# EAGLE board Sen_2222 (EAGLE 6.0)

Size 63.48 x 50.47 mm. Coordinates in mm from the lower left corner, seen from the top.
Outline: 0,0 63.48,0 63.48,50.47 0,50.47 0,0
Copper layers (1*16): Top 0.035mm / dielectric 1.5mm / Bottom 0.035mm
Design rules: minimum track width 10mil, minimum drill 24mil, track to track 8mil, track to pad 8mil, pad to pad 8mil, via to via 8mil, smd to smd 8mil, copper to edge 40mil, drill to drill 8mil, minimum pad ring 10mil, minimum via ring 8mil, stop-mask expansion 4mil, vias tented up to drill 0mil, thermal gap 10mil
tRestrict: area 49.5,25.4 to 54.6,27.9; area 53.7,3.8 to 55,5.1; area 47,3.8 to 48.3,5.1; area 36.8,26.7 to 41.9,31.8; area 57.1,1.3 to 62.2,6.3; area 57.1,26.7 to 62.2,31.8; area 36.8,44.5 to 41.9,49.5
bRestrict: area 49.5,25.4 to 54.6,27.9; area 47,3.8 to 48.3,5.1; area 53.7,3.8 to 55,5.1; area 36.8,26.7 to 41.9,31.8; area 57.1,1.3 to 62.2,6.3; area 57.1,26.7 to 62.2,31.8; area 36.8,44.5 to 41.9,49.5

## Footprints (pad centres in the part's own frame; a part is rotated, then mirrored left to right if it is on the bottom)
0402-CAP = smd 0.7 x 0.9: 1 -0.65,0; 2 0.65,0
EIA3216 = smd 1.4 x 1.6: A 1.4,0; C -1.4,0
A1353HEX = drill 0.813 long: 1 3.81,-2.54; 2 -3.81,2.54; 4 3.81,2.54; 8 -3.81,-2.54; C 3.81,0
FTDI_BASIC = drill 1.016 pad 1.88: CTS 10.16,0; DTR 0,0; GND 12.7,0; RXI 2.54,0; TXO 5.08,0; VCC 7.62,0
JP4 = drill 0.914 long: 1 -3.81,0; 2 -1.27,0; 3 1.27,0; 4 3.81,0
1X02_NO_SILK = drill 1.016 pad 1.88: 1 0,0; 2 2.54,0
STAND-OFF = hole 3.302: 0,0
LED-0603 = smd 0.8 x 0.8: A 0,-0.75; C 0,0.75
0402-RES = smd 0.7 x 0.9: 1 -0.65,0; 2 0.65,0
RN-9 = drill 0.813 long: 1 -10.16,0; 2 -7.62,0; 3 -5.08,0; 4 -2.54,0; 5 0,0; 6 2.54,0; 7 5.08,0; 8 7.62,0; 9 10.16,0
AYZ0202 = smd 1 x 1.15: 1 -2.5,2.825; 2 0,2.825; 3 2.5,2.825; 4 -2.5,-2.825; 5 0,-2.825; 6 2.5,-2.825 | hole 0.85: 1.5,0; -1.5,0
TYCO_FSM = smd 1.6 x 2.1: 1 0,-4.51; 2 -0.01,4.5
A68-A31 = drill 0.813 long: 1 -2.54,-2.54; 2 0,-2.54; 3 2.54,-2.54; 4 -2.54,2.54; 5 0,2.54; 6 2.54,2.54
TYCO_FSMRACDA = drill 1 square: 1 0,2.24 | drill 0.7 square: 2 0.1,-2.24 | hole 1: 2.5,3.5 | hole 0.9: 2.5,-3.5
SYNAPSE_SN700PC1 = smd 2.54 x 1.02: P$1 0,28.83; P$2 0,27.56; P$3 0,26.32; P$4 0,25.02; P$5 0,23.75; P$6 0,22.48; P$7 0,21.21; P$8 0,19.94; P$9 0,18.67; P$10 0,17.4; P$11 0,16.13; P$12 0,14.86; P$13 0,13.59; P$14 0,12.32; P$15 0,11.05; P$16 0,9.78; P$17 0,8.51; P$18 0,7.24; P$19 0,5.97; P$20 0,4.7; P$21 0,3.43; P$40 25.41,3.43; P$41 25.4,4.7; P$42 25.42,5.97; P$43 25.4,7.24; P$44 25.4,8.51; P$45 25.4,9.78; P$46 25.4,11.05; P$47 25.4,12.32; P$48 25.4,13.59; P$49 25.4,14.86; P$50 25.4,16.13; P$51 25.4,17.4; P$52 25.4,18.67; P$53 25.4,19.94; P$54 25.4,21.21; P$55 25.4,22.48; P$56 25.4,23.75; P$57 25.4,25.02; P$58 25.4,26.29; P$59 25.4,27.56; P$60 25.4,28.83 | smd 1.02 x 2.54: P$22 1.91,1.27; P$23 3.19,1.26; P$24 4.46,1.26; P$25 5.73,1.26; P$26 7,1.26; P$27 8.27,1.26; P$28 9.54,1.26; P$29 10.82,1.26; P$30 12.09,1.26; P$31 13.35,1.26; P$32 14.62,1.26; P$33 15.89,1.26; P$34 17.16,1.26; P$35 18.43,1.26; P$36 19.7,1.26; P$37 20.97,1.26; P$38 22.24,1.26; P$39 23.51,1.26
SOT23-5 = smd 0.55 x 1.2: 1 -0.95,-1.3; 2 0,-1.3; 3 0.95,-1.3; 4 0.95,1.3; 5 -0.95,1.3
SMD-7SEG = smd 1 x 1.5: 1 3,-5.7; 2 1.5,-5.7; 3 0,-5.7; 4 -1.5,-5.7; 5 -3,-5.7; 6 -3,5.7; 7 -1.5,5.7; 8 0,5.7; 9 1.5,5.7; 10 3,5.7

## Placement (x,y rotation side)
C1  10uF  [0402-CAP]  34.29,26.67 270 top
C2  10uF  [EIA3216]  54.61,34.29 270 top
C3  10uF  [EIA3216]  50.8,39.37 180 top
C4  1uF  [0402-CAP]  50.8,35.56 0 top
CH  HIX DIP  [A1353HEX]  45.72,11.43 90 top
DIV_ID  HIX DIP  [A1353HEX]  57.15,13.97 90 top
JP1  FTDI  [FTDI_BASIC]  38.1,17.78 270 top
JP2  LIPO_charger  [JP4]  60.96,38.1 270 top
JP3  I2C_BUS  [1X02_NO_SILK]  31.75,48.26 0 top
JP4  STAND-OFF  [STAND-OFF]  59.69,3.81 0 top
JP5  STAND-OFF  [STAND-OFF]  3.81,3.81 0 top
JP6  STAND-OFF  [STAND-OFF]  3.81,46.99 0 top
JP7  STAND-OFF  [STAND-OFF]  59.69,46.99 0 top
JP8  STAND-OFF  [STAND-OFF]  59.69,29.21 0 top
JP9  STAND-OFF  [STAND-OFF]  39.37,46.99 0 top
JP10  STAND-OFF  [STAND-OFF]  39.37,29.21 0 top
LED1  RED  [LED-0603]  46.99,24.13 180 top
LED2  GREEN  [LED-0603]  29.21,8.89 180 top
LED3  YELLOW  [LED-0603]  31.75,8.89 180 top
LED4  BLUE  [LED-0603]  34.29,8.89 180 top
R1  100k  [0402-RES]  45.72,39.37 0 top
R2  1k  [0402-RES]  46.99,30.48 90 top
R3  330  [0402-RES]  29.21,5.08 90 top
R4  330  [0402-RES]  30.48,5.08 90 top
R5  330  [0402-RES]  31.75,5.08 90 top
R6  330  [0402-RES]  27.94,48.26 270 top
R7  330  [0402-RES]  8.89,45.72 0 top
RN2  22K  [RN-9]  16.51,7.62 0 top
S1  Secondary sw  [AYZ0202]  52.07,26.67 0 top
S2  RESET  [TYCO_FSM]  37.59,40.01 270 top
S3  Primary sw  [A68-A31]  50.93,45.59 180 top
S4  TOGGLE  [TYCO_FSMRACDA]  50.93,2.03 90 top
U1  SM700PC1SMD  [SYNAPSE_SN700PC1]  30.48,13.97 90 top
U2  MIC5219  [SOT23-5]  44.45,35.56 90 top
U3  KCSA03-102SMD_7SEG  [SMD-7SEG]  17.78,45.72 90 top

## Library data of the parts
C1-C4 R1-R7 = SparkFun-Passives
CH DIV_ID = switch-dil; OC_FARNELL: unknown; OC_NEWARK: unknown
JP1 JP3 = SparkFun-Connectors
JP2 = jumper
JP4-JP10 = SparkFun
LED1-LED4 = SparkFun-LED
RN2 = resistor-net; OC_FARNELL: unknown; OC_NEWARK: unknown
S1 = SparkFun-Electromechanical
S2 S4 = cy_fsmsm
S3 = switch
U1 = Synapse_SM700PC1
U2 = SparkFun-PowerIC
U3 = cy-7-seg

## Nets
3.3V: C1.1 C3.A C4.1 CH.C DIV_ID.C JP1.VCC R1.2 R2.2 R6.1 R7.1 S4.2 U1.P$12 U1.P$31 U2.5
7SEG_A: U1.P$57 U3.7
7SEG_B: U1.P$56 U3.6
7SEG_C: U1.P$55 U3.4
7SEG_D: U1.P$54 U3.2
7SEG_DP: U1.P$46 U3.5
7SEG_E: U1.P$53 U3.1
7SEG_F: U1.P$52 U3.9
7SEG_G: U1.P$48 U3.10
ADC0: RN2.2 U1.P$8
ADC1: RN2.3 U1.P$9
ADC2: RN2.4 U1.P$10
ADC3: RN2.5 U1.P$11
ADC4: RN2.6 U1.P$13
ADC5: RN2.7 U1.P$14
ADC6: RN2.8 U1.P$15
ADC7: RN2.9 U1.P$16
CH_1: CH.1 U1.P$34
CH_2: CH.2 U1.P$33
CH_3: CH.4 U1.P$32
CH_4: CH.8 U1.P$30
CTS2: JP1.CTS U1.P$23
DIV_1: DIV_ID.1 U1.P$43
DIV_2: DIV_ID.2 U1.P$42
DIV_3: DIV_ID.4 U1.P$41
DIV_4: DIV_ID.8 U1.P$40
EN: JP2.4 S3.5
GND: C1.2 C2.C C3.C C4.2 JP1.GND JP2.3 LED1.C R3.1 R4.1 R5.1 RN2.1 S2.1 S3.6 U1.P$1 U1.P$2 U1.P$3 U1.P$22 U1.P$38 U1.P$51 U1.P$58 U1.P$59 U1.P$60 U2.2
LED2: LED2.A U1.P$17
LED3: LED3.A U1.P$18
LED4: LED4.A U1.P$19
N$1: LED3.C R4.2
N$2: LED1.A R2.1
N$3: R6.2 U3.3
N$4: LED2.C R3.2
N$5: R7.2 U3.8
N$6: LED4.C R5.2
PS: JP2.1
RESET: R1.1 S2.2 U1.P$49
RTS2: JP1.DTR U1.P$21
RX2: JP1.TXO U1.P$24
SCL: JP3.2 U1.P$29
SDA: JP3.1 U1.P$28
TOGL: S4.1 U1.P$20
TX2: JP1.RXI U1.P$25
VBATT: JP2.2 S3.2 S3.4
VCC1: S1.3 S3.1
VIN: C2.A S1.2 U2.1 U2.3

## Tracks (layer width: path | path; a pad name or v marks a point on that pad's centre or on a via)
3.3V  (13 unrouted)
7SEG_A  (1 unrouted)
7SEG_B  (1 unrouted)
7SEG_C  (1 unrouted)
7SEG_D  (1 unrouted)
7SEG_DP  (1 unrouted)
7SEG_E  (1 unrouted)
7SEG_F  (1 unrouted)
7SEG_G  (1 unrouted)
ADC0  (1 unrouted)
ADC1  (1 unrouted)
ADC2  (1 unrouted)
ADC3  (1 unrouted)
ADC4  (1 unrouted)
ADC5  (1 unrouted)
ADC6  (1 unrouted)
ADC7  (1 unrouted)
CH_1  (1 unrouted)
CH_2  (1 unrouted)
CH_3  (1 unrouted)
CH_4  (1 unrouted)
CTS2  (1 unrouted)
DIV_1  (1 unrouted)
DIV_2  (1 unrouted)
DIV_3  (1 unrouted)
DIV_4  (1 unrouted)
EN  (1 unrouted)
GND  (22 unrouted)
LED2  (1 unrouted)
LED3  (1 unrouted)
LED4  (1 unrouted)
N$1  (1 unrouted)
N$2  (1 unrouted)
N$3  (1 unrouted)
N$4  (1 unrouted)
N$5  (1 unrouted)
N$6  (1 unrouted)
RESET  (2 unrouted)
RTS2  (1 unrouted)
RX2  (1 unrouted)
SCL  (1 unrouted)
SDA  (1 unrouted)
TOGL  (1 unrouted)
TX2  (1 unrouted)
VBATT  (2 unrouted)
VCC1  (1 unrouted)
VIN  (3 unrouted)

## Text on the board
Bottom: 10-02-2013 | Kartik Karuna | Designed by:
tPlace: SDA | SCL | Kartik Karuna | Samarth Deo | PWR | SM700 | ScenOchSinneSensor | GND | GRN | CTC | 3.3V | RX | A | B | C | TX | RST | BLK | 3.3V